# Altium PCB STM32_DEVBOARD_V1.1.PcbDoc (part 2 of 2)
Units mm, origin at the board's own origin, x right, y up, seen from the top; angles counter-clockwise.
Board outline 38.6 x 103 mm, 4 copper layers (Top Layer, Mid-Layer 1, Mid-Layer 2, Bottom Layer); 59 components, 115 nets, 379 pads, 250 vias.
Unrouted connection lines stored in the file: 6.
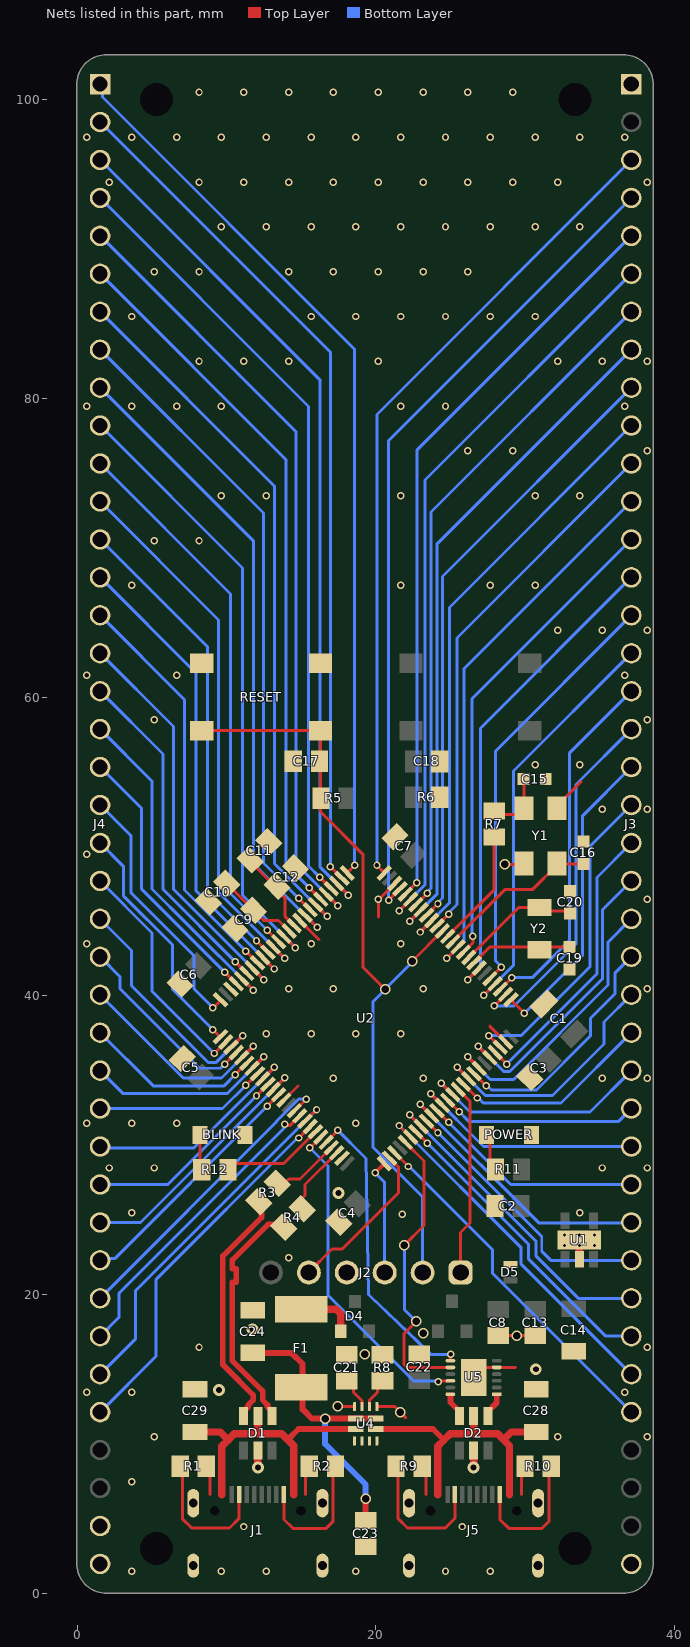
[diagram p4: the nets of this part, all layers, seen from the top]

## Via types
v1: diameter 0.5, hole 0.3, Top Layer to Bottom Layer, tented both sides, 219 vias
v2: diameter 0.7, hole 0.5, Top Layer to Bottom Layer, tented both sides, 24 vias
v3: diameter 0.8, hole 0.4, Top Layer to Bottom Layer, tented both sides, 6 vias
v4: diameter 1.27, hole 0.711, Top Layer to Bottom Layer, tented both sides, 1 vias

## Nets (pads, with @x,y where several pads share a name; then routed paths per layer and width w, separated by ;. In a path a pad name is that pad's centre, name@x,y a point inside that pad or via, vN(x,y) a via of type N, cw(c..) or ccw(c..) an arc to the next point about the centre after c; other vN are vias at no path point) (continued)
GND: BLINK.1 C1.1 C2.1 C3.1 C4.1 C5.1 C6.1 C7.1 C8.1 C9.1 C10.1 C11.1 C12.1 C13.1 C14.1 C15.1 C16.1 C17.1 C18.1 C19.1 C20.1 C21.1 C22.2 C23.1 C24.1 C28.1 C29.1 D1.2 D2.2 D5.2 J1.A1/B12 J1.A12/B1 J2.4 J3.01 J3.40 J4.39 J4.40 J5.A1/B12 J5.A12/B1 POWER.1 R1.1 R2.1 R6.1 R8.1 R9.1 R10.1 RESET.3 RESET.4 U1.2 U1.EP U1.EP_1 U1.EP_2 U1.EP_3 U1.EP_4 U1.EP_5 U1.EP_6 U2.23 U2.35 U2.48 U2.63 U2.74 U2.99 U4.3 U4.4 U4.5 U4.6 U4.9 U4.12 U5.5 U5.13 Y1.2 Y1.4 | length 31.2
  Top Layer w0.2: R1.1@8.647,8.429 8.892,8.184 J1.A1/B12@8.892,6.605 ; U2.63@13.837,33.02 14.783,33.966 ; U2.35@14.898,45.041 16.174,43.764 ; J1.A12/B1@15.292,6.605 15.292,8.184 R2.1@15.537,8.429 ; v2(17.45,12.522) 17.461,12.511 18.567,12.511 U4.12@18.567,12.5 ; U4.9@20.067,12.5 21.257,12.5 21.996,11.76 ; 20.157,45.273 v1(20.157,46.473) ; v1@20.242,46.496 U2.23@21.262,47.516 ; R9.1@23.097,8.429 23.342,8.184 J5.A1/B12@23.342,6.605 ; U5.13@26.538,14.45 27.213,15.125 U5.5@28.088,15.125 29.349,15.125 ; 27.626,37.97 U2.99@28.686,36.909 ; C8.1@28.192,17.25 C13.1@30.667,17.25 ; v2(28.617,48.8) 29.865,48.8 Y1.2@29.917,48.852 ; J5.A12/B1@29.742,6.605 R10.1@29.742,8.184 ; R10.1@29.987,8.184 R10.1@30.232,8.429 ; Y1.4@32.117,52.552 32.117,52.727 33.74,54.35
  Top Layer w0.5: D1.2@12.088,9.499 12.096,9.491 v3(12.096,8.429) ; D2.2@26.538,9.499 26.546,9.491 v3(26.546,8.429) ; U1.2@33.617,22.35 U1.EP_3@33.617,23.3 U1.EP@33.617,23.65
  other v1: 3.657,1.473 9.657,1.473 12.657,1.473 18.657,1.473 24.657,1.473 27.657,1.473 11.157,4.473 25.792,4.473 3.657,7.473 5.157,10.473 32.157,10.473 38.157,10.473 0.657,13.473 3.657,13.473 36.657,13.473 8.157,16.473 38.157,16.473 14.157,22.473 21.769,25.361 3.657,25.473 33.657,25.473 2.157,28.473 5.157,28.473 35.157,28.473 38.157,28.473 0.657,31.473 3.657,31.473 6.657,31.473 18.657,31.473 17.157,34.473 23.157,34.473 35.157,34.473 38.157,34.473 12.657,37.473 15.657,37.473 18.657,37.473 21.657,37.473 14.157,40.473 17.157,40.473 23.157,40.473 38.157,40.473 0.657,43.473 15.657,43.473 21.657,43.473 38.157,46.473 0.657,49.473 35.157,52.473 38.157,52.473 30.657,55.473 33.657,55.473 5.157,58.473 38.157,58.473 0.657,61.473 6.657,61.473 36.657,61.473 32.157,64.473 35.157,64.473 38.157,64.473 3.657,67.473 21.657,67.473 27.657,67.473 30.657,67.473 5.157,70.473 8.157,70.473 9.657,73.473 12.657,73.473 21.657,73.473 30.657,73.473 33.657,73.473 26.157,76.473 29.157,76.473 38.157,76.473 0.657,79.473 3.657,79.473 6.657,79.473 9.657,79.473 21.657,79.473 24.657,79.473 36.657,79.473 8.157,82.473 11.157,82.473 14.157,82.473 20.157,82.473 32.157,82.473 35.157,82.473 38.157,82.473 3.657,85.473 15.657,85.473 18.657,85.473 21.657,85.473 24.657,85.473 27.657,85.473 30.657,85.473 5.157,88.473 8.157,88.473 14.157,88.473 17.157,88.473 20.157,88.473 23.157,88.473 26.157,88.473 9.657,91.473 12.657,91.473 15.657,91.473 18.657,91.473 21.657,91.473 24.657,91.473 27.657,91.473 30.657,91.473 33.657,91.473 2.157,94.473 8.157,94.473 11.157,94.473 14.157,94.473 17.157,94.473 20.157,94.473 23.157,94.473 26.157,94.473 29.157,94.473 32.157,94.473 38.157,94.473 0.657,97.473 3.657,97.473 6.657,97.473 9.657,97.473 12.657,97.473 15.657,97.473 18.657,97.473 21.657,97.473 24.657,97.473 27.657,97.473 30.657,97.473 33.657,97.473 36.657,97.473 8.157,100.473 11.157,100.473 14.157,100.473 17.157,100.473 20.157,100.473 23.157,100.473 26.157,100.473 29.157,100.473
  other v2: 21.627,12.13 19.253,16.002 29.43,17.25 23.165,17.424
  other v3: 9.5,13.6 30.7,15 11.735,17.678 17.5,26.8
LED_BLINK: R12.1 U2.69 | length 6.9
  Top Layer w0.2: R12.1@10.095,28.346 10.527,28.778 13.838,28.778 U2.69@15.958,30.899
NetBLINK_2: BLINK.2 R12.2 | length 2.4
  Top Layer w0.2: BLINK.2@8.229,30.683 8.229,28.463 R12.2@8.345,28.346
NetC9_2: C9.2 C10.2 U2.37 | length 5.5
  Top Layer w0.2: C10.2@10.013,47.537 10.013,47.514 12.487,45.041 13.483,45.041 U2.37@14.19,44.334
NetC11_2: C11.2 C12.2 U2.36 | length 5.6
  Top Layer w0.2: C11.2@11.581,49.085 11.581,48.986 13.307,47.26 13.307,47.165 13.901,46.571 13.901,45.33 U2.36@14.544,44.687
NetC15_2: C15.2 R7.2 Y1.1 | length 4.1
  Top Layer w0.2: R7.2@27.917,52.15 Y1.1@29.515,52.15 ; Y1.1@29.917,52.552 C15.2@29.917,54.452
  Top Layer w0.254: Y1.1@29.515,52.15 Y1.1@29.917,52.552 ; C15.2@29.867,54.502 C15.2@29.917,54.452
NetC21_2: C21.2 U4.11 | length 2.1
  Top Layer w0.2: C21.2@18.167,14.2 18.5,13.867 18.5,13.467 19.067,12.9 U4.11@19.067,12.5
NetD4_1: D4.1 F1.1 | length 4
  Top Layer w0.5: F1.1@14.992,19.015 17.357,19.015 17.65,18.722 D4.1@17.65,17.5
NetJ1_A5: J1.A5 R1.2 | length 9.5
  Top Layer w0.2: R1.2@7.042,8.615 7.042,5 7.667,4.375 10.192,4.375 10.842,5.025 J1.A5@10.842,6.555
NetJ1_B5: J1.B5 R2.2 | length 8.9
  Top Layer w0.2: J1.B5@13.842,6.375 13.842,4.95 14.442,4.35 16.667,4.35 17.142,4.825 R2.2@17.142,8.575
NetJ1_Shell: J1.1 J1.2 J1.3 J1.4 | length 0
  Bottom Layer w0.2: J1.4@16.412,1.805 J1.4@16.442,1.775
NetJ5_A5: J5.A5 R9.2 | length 9.5
  Top Layer w0.2: R9.2@21.492,8.615 21.492,5 22.117,4.375 24.642,4.375 25.292,5.025 J5.A5@25.292,6.555
NetJ5_B5: J5.B5 R10.2 | length 8.9
  Top Layer w0.2: J5.B5@28.292,6.375 28.292,4.95 28.892,4.35 31.117,4.35 31.592,4.825 R10.2@31.592,8.575
NetJ5_Shell: J5.1 J5.2 J5.3 J5.4
NetPOWER_2: POWER.2 R11.2 | length 2.6
  Top Layer w0.2: POWER.2@27.405,30.683 27.635,30.453 27.635,28.88 27.993,28.522 R11.2@27.993,28.372
NetR3_2: R3.2 U2.72 | length 4.8
  Top Layer w0.2: R3.2@13.258,27.537 13.362,27.433 13.867,27.433 14.165,27.731 14.912,27.731 U2.72@17.019,29.838
NetR4_2: R4.2 U2.73 | length 4.7
  Top Layer w0.2: R4.2@15.061,25.746 15.051,25.756 15.051,26.428 15.251,26.628 15.251,27.363 U2.73@17.372,29.484
NetR8_2: R8.2 U4.10 | length 2.1
  Top Layer w0.2: U4.10@19.567,12.5 19.567,12.925 20.109,13.467 20.109,13.767 R8.2@20.567,14.225
NRST: C17.2 J2.2 R5.1 RESET.1 RESET.2 U2.14 | length 53.3
  Top Layer w0.2: RESET.2@8.342,57.75 RESET.1@16.292,57.75 16.292,55.7 16.292,53.35 16.217,53.275 16.284,53.208 16.284,52.317 19.119,49.482 19.119,41.923 v2(20.617,40.425) ; v2(22.442,42.325) 22.442,42.329 24.444,44.33 U2.14@24.444,44.334
  Bottom Layer w0.2: v2(22.442,42.325) 22.442,42.287 20.617,40.462 v2(20.617,40.425) 19.812,39.62 19.812,29.845 23.127,26.53 J2.2@23.127,21.475
OSC32_IN: C19.2 U2.8 Y2.1 | length 6.8
  Top Layer w0.2: U2.8@26.565,42.212 27.607,43.254 30.944,43.254 C19.2@32.942,43.254
OSC32_OUT: C20.2 U2.9 Y2.2 | length 8.2
  Top Layer w0.2: U2.9@26.211,42.566 29.559,45.914 Y2.2@30.944,45.914 31.183,45.675 C20.2@32.899,45.675
OSC_IN: C16.2 U2.12 Y1.3 | length 10.9
  Top Layer w0.2: U2.12@25.151,43.627 28.624,47.1 30.465,47.1 Y1.3@32.117,48.752 ; Y1.3@32.142,48.827 C16.2@33.891,48.827
  Top Layer w0.254: Y1.3@32.117,48.852 Y1.3@32.142,48.827
OSC_OUT: R7.1 U2.13 | length 8
  Top Layer w0.2: U2.13@24.797,43.98 27.917,47.1 R7.1@27.917,50.65
PA0: J3.06 U2.20 | length 50.2
  Top Layer w0.2: v1(21.551,45.684) U2.20@22.322,46.455
  Bottom Layer w0.2: v1(21.551,45.684) 23.292,47.425 23.292,74.525 J3.06@37.097,88.33
PA1: J3.05 U2.21 | length 50.3
  Top Layer w0.2: U2.21@21.969,46.809 v1(22.74,47.58)
  Bottom Layer w0.2: v1(22.74,47.58) 22.74,76.513 J3.05@37.097,90.87
PA2: J3.04 U2.22 | length 54.8
  Top Layer w0.2: v1(20.844,46.391) U2.22@21.615,47.162
  Bottom Layer w0.2: v1(20.844,46.391) 20.844,77.157 J3.04@37.097,93.41
PA3: J3.03 U2.25 | length 55
  Top Layer w0.2: v1(20.071,48.725) 20.554,48.241 U2.25@20.554,48.223
  Bottom Layer w0.2: v1(20.071,48.725) 20.067,48.729 20.067,78.92 J3.03@37.097,95.95
PA4: J4.01 U2.26 | length 60
  Top Layer w0.2: U2.26@18.08,48.238 v1(18.567,48.725)
  Bottom Layer w0.2: J4.01@1.537,101.03 1.692,100.875 1.692,100.162 18.567,83.287 v1(18.567,48.725)
PA5: J4.02 U2.27 | length 57.3
  Top Layer w0.2: v1(16.955,48.641) U2.27@17.726,47.869
  Bottom Layer w0.2: J4.02@1.545,98.497 16.955,83.087 v1(16.955,48.641)
PA6: J4.03 U2.28 | length 57.2
  Top Layer w0.2: U2.28@17.372,47.516 v1(18.144,46.744)
  Bottom Layer w0.2: J4.03@1.537,95.95 16.248,81.239 16.248,48.641 v1(18.144,46.744)
PA7: J4.04 U2.29 | length 53.2
  Top Layer w0.2: v1(16.248,47.933) U2.29@17.019,47.162
  Bottom Layer w0.2: J4.04@1.138,93.809 15.492,79.455 15.492,48.689 v1(16.248,47.933)
PA15: J3.36 U2.78 | length 24
  Top Layer w0.2: U2.78@21.262,29.484 v1(22.173,28.573)
  Bottom Layer w0.2: v1(22.173,28.573) 22.227,28.573 27.8,23 27.8,21.427 J3.36@37.117,12.11
PB0: J4.07 U2.32 | length 47.8
  Top Layer w0.2: U2.32@15.958,46.101 v1(16.73,45.33)
  Bottom Layer w0.2: J4.07@1.537,85.79 13.217,74.11 13.217,48.843 v1(16.73,45.33)
PB1: J4.08 U2.33 | length 43.3
  Top Layer w0.2: v1(14.833,46.519) U2.33@15.605,45.748
  Bottom Layer w0.2: J4.08@1.537,83.25 12.467,72.32 12.467,48.886 v1(14.833,46.519)
PB2: J4.09 U2.34 | length 43.3
  Top Layer w0.2: U2.34@15.251,45.394 v1(16.068,44.577)
  Bottom Layer w0.2: J4.09@1.537,80.71 11.817,70.43 11.817,48.828 v1(16.068,44.577)
PB4: J3.26 U2.91 | length 13.7
  Top Layer w0.2: U2.91@25.858,34.081 v1(26.781,33.158)
  Bottom Layer w0.2: v1(26.781,33.158) 26.862,33.158 27.192,32.827 32.394,32.827 J3.26@37.097,37.53
PB5: J3.25 U2.92 | length 17.2
  Top Layer w0.2: v1(25.44,35.205) U2.92@26.211,34.434
  Bottom Layer w0.2: v1(25.44,35.205) 27.32,33.325 31.817,33.325 35.267,36.775 35.267,38.24 J3.25@37.097,40.07
PB6: J3.24 U2.93 | length 16.2
  Top Layer w0.2: U2.93@26.565,34.788 v1(27.385,33.968)
  Bottom Layer w0.2: v1(27.385,33.968) 27.466,33.968 27.734,33.7 30.742,33.7 34.367,37.325 34.367,38.495 35.992,40.12 35.992,41.505 J3.24@37.097,42.61
PB7: J3.23 U2.94 | length 18.8
  Top Layer w0.2: v1(26.147,35.913) U2.94@26.918,35.141
  Bottom Layer w0.2: v1(26.147,35.913) 27.66,34.4 29.218,34.4 35.535,40.716 35.535,43.588 J3.23@37.097,45.15
PB9: J3.22 U2.96 | length 20
  Top Layer w0.2: v1(26.847,36.626) U2.96@27.626,35.848
  Bottom Layer w0.2: v1(26.847,36.626) 28.549,34.925 28.954,34.925 35.154,41.125 35.154,45.747 J3.22@37.097,47.69
PB10: J4.19 U2.47 | length 18.3
  Top Layer w0.2: v1(9.884,41.569) U2.47@10.655,40.798
  Bottom Layer w0.2: J4.19@1.537,55.31 4.317,52.53 4.317,47.136 v1(9.884,41.569)
PB11: J4.20 U2.50 | length 17.4
  Top Layer w0.2: v1(9.092,39.2) 9.126,39.2 U2.50@9.622,39.695
  Bottom Layer w0.2: J4.20@1.537,52.77 3.617,50.69 3.617,46.88 7.817,42.68 7.817,40.475 v1(9.092,39.2)
PB12: J4.21 U2.51 | length 16.3
  Top Layer w0.2: v1(9.092,37.725) 9.554,37.263 U2.51@9.594,37.263
  Bottom Layer w0.2: J4.21@1.537,50.23 3.092,48.675 3.092,46.7 6.392,43.4 6.392,40.425 v1(9.092,37.725)
PB13: J4.22 U2.52 | length 15.8
  Top Layer w0.2: v1(9.176,36.138) U2.52@9.948,36.909
  Bottom Layer w0.2: J4.22@1.537,47.69 5.017,44.21 5.017,40.297 v1(9.176,36.138)
PB14: J4.23 U2.53 | length 16.8
  Top Layer w0.2: U2.53@10.301,36.555 v1(11.073,37.327)
  Bottom Layer w0.2: J4.23@1.467,45.2 3.642,43.025 3.642,40.675 8.792,35.525 9.271,35.525 v1(11.073,37.327)
PB15: J4.24 U2.54 | length 13.1
  Top Layer w0.2: v1(9.884,35.431) U2.54@10.655,36.202
  Bottom Layer w0.2: J4.24@1.537,42.61 2.867,41.28 2.867,40.475 8.192,35.15 9.603,35.15 v1(9.884,35.431)
PC0: J3.11 U2.15 | length 36.3
  Top Layer w0.2: U2.15@24.09,44.687 v1(24.861,45.459)
  Bottom Layer w0.2: v1(24.861,45.459) 24.861,45.54 25.425,46.104 25.425,63.958 J3.11@37.097,75.63
PC1: J3.10 U2.16 | length 40.8
  Top Layer w0.2: v1(22.965,44.269) U2.16@23.736,45.041
  Bottom Layer w0.2: v1(22.965,44.269) 24.917,46.222 24.917,65.99 J3.10@37.097,78.17
PC2: J3.09 U2.17 | length 41
  Top Layer w0.2: U2.17@23.383,45.394 v1(24.154,46.166)
  Bottom Layer w0.2: v1(24.154,46.166) 24.154,46.247 24.46,46.553 24.46,68.073 J3.09@37.097,80.71
PC3: J3.08 U2.18 | length 45.5
  Top Layer w0.2: v1(22.258,44.976) U2.18@23.029,45.748
  Bottom Layer w0.2: v1(22.258,44.976) 24.079,46.798 24.079,70.232 J3.08@37.097,83.25
PC4: J4.05 U2.30 | length 52.5
  Top Layer w0.2: U2.30@16.665,46.809 v1(17.437,46.037)
  Bottom Layer w0.2: J4.05@1.537,90.87 14.642,77.765 14.642,48.832 v1(17.437,46.037)
PC5: J4.06 U2.31 | length 48
  Top Layer w0.2: v1(15.54,47.226) U2.31@16.312,46.455
  Bottom Layer w0.2: J4.06@1.537,88.33 13.97,75.897 13.97,48.797 v1(15.54,47.226)
PC6: J4.33 U2.65 | length 20.5
  Top Layer w0.2: U2.65@14.544,32.313 14.563,32.313 15.315,33.065 v1(15.334,33.065)
  Bottom Layer w0.2: J4.33@1.537,19.75 13.332,31.545 13.332,31.583 14.833,33.084 15.315,33.084 v1(15.334,33.065)
PC7: J4.34 U2.66 | length 20.6
  Top Layer w0.2: v1(13.904,31.41) 13.985,31.41 14.069,31.327 14.265,31.327 U2.66@14.898,31.959
  Bottom Layer w0.2: J4.34@1.537,17.21 2.792,18.465 2.792,20.075 13.847,31.13 13.847,31.353 v1(13.904,31.41)
PC8: J4.35 U2.67 | length 24.8
  Top Layer w0.2: U2.67@15.251,31.606 v1(16.022,32.377)
  Bottom Layer w0.2: J4.35@1.537,14.67 3.917,17.05 3.917,20.272 v1(16.022,32.377)
PC9: J4.36 U2.68 | length 25
  Top Layer w0.2: v1(14.833,30.481) U2.68@15.605,31.252
  Bottom Layer w0.2: J4.36@1.537,12.13 5.292,15.885 5.292,21.021 14.752,30.481 v1(14.833,30.481)
PC12: J3.35 U2.81 | length 24.2
  Top Layer w0.2: v1(21.551,31.316) U2.81@22.322,30.545
  Bottom Layer w0.2: v1(21.551,31.316) 29.7,23.167 29.7,22.067 J3.35@37.097,14.67
PC13: J3.14 U2.7 | length 32.5
  Top Layer w0.2: v1(26.147,41.087) U2.7@26.918,41.859
  Bottom Layer w0.2: v1(26.147,41.087) 26.992,41.932 26.992,57.905 J3.14@37.097,68.01
PD0: J3.34 U2.82 | length 20.7
  Top Layer w0.2: U2.82@22.676,30.899 v1(23.447,30.127)
  Bottom Layer w0.2: v1(23.447,30.127) 30.197,23.377 30.197,22.403 35.39,17.21 J3.34@37.097,17.21
PD1: J3.33 U2.83 | length 21.6
  Top Layer w0.2: v1(22.258,32.024) U2.83@23.029,31.252
  Bottom Layer w0.2: v1(22.258,32.024) 30.7,23.581 30.7,22.6 33.55,19.75 J3.33@37.097,19.75
PD2: J3.32 U2.84 | length 18.2
  Top Layer w0.2: U2.84@23.383,31.606 v1(24.154,30.834)
  Bottom Layer w0.2: v1(24.154,30.834) 31.1,23.889 31.1,22.9 31.71,22.29 J3.32@37.097,22.29
PD3: J3.31 U2.85 | length 18.5
  Top Layer w0.2: v1(22.965,32.731) U2.85@23.736,31.959
  Bottom Layer w0.2: v1(22.965,32.731) 30.896,24.8 J3.31@37.067,24.8
PD4: J3.30 U2.86 | length 15.1
  Top Layer w0.2: U2.86@24.09,32.313 v1(24.861,31.541)
  Bottom Layer w0.2: v1(24.861,31.541) 29.033,27.37 J3.30@37.097,27.37
PD5: J3.29 U2.87 | length 16
  Top Layer w0.2: v1(23.672,33.438) U2.87@24.444,32.666
  Bottom Layer w0.2: v1(23.672,33.438) 27.2,29.91 J3.29@37.097,29.91
PD6: J3.28 U2.88 | length 13.2
  Top Layer w0.2: U2.88@24.797,33.02 v1(25.568,32.249)
  Bottom Layer w0.2: v1(25.568,32.249) 26.217,31.6 36.247,31.6 J3.28@37.097,32.45
PD7: J3.27 U2.89 | length 15.7
  Top Layer w0.2: v1(24.379,34.145) U2.89@25.151,33.373
  Bottom Layer w0.2: v1(24.379,34.145) 26.296,32.228 34.335,32.228 J3.27@37.097,34.99
PD8: J4.25 U2.55 | length 14.6
  Top Layer w0.2: U2.55@11.008,35.848 v1(11.78,36.62)
  Bottom Layer w0.2: J4.25@1.537,40.07 1.501,40.106 7.109,34.498 9.659,34.498 v1(11.78,36.62)
PD9: J4.26 U2.56 | length 12
  Top Layer w0.2: v1(10.591,34.723) U2.56@11.362,35.495
  Bottom Layer w0.2: J4.26@1.501,37.566 5.092,33.975 9.842,33.975 v1(10.591,34.723)
PD10: J4.27 U2.57 | length 13.7
  Top Layer w0.2: U2.57@11.716,35.141 v1(12.487,35.913)
  Bottom Layer w0.2: J4.27@1.537,34.99 3.077,33.45 10.024,33.45 v1(12.487,35.913)
PD11: J4.28 U2.58 | length 11.5
  Top Layer w0.2: v1(11.298,34.016) U2.58@12.069,34.788
  Bottom Layer w0.2: J4.28@1.537,32.45 9.731,32.45 v1(11.298,34.016)
PD12: J4.29 U2.59 | length 15
  Top Layer w0.2: U2.59@12.423,34.434 v1(13.194,35.205)
  Bottom Layer w0.2: J4.29@1.537,29.8 7.789,29.8 v1(13.194,35.205)
PD13: J4.30 U2.60 | length 14
  Top Layer w0.2: v1(12.005,33.309) U2.60@12.776,34.081
  Bottom Layer w0.2: J4.30@1.537,27.37 6.066,27.37 v1(12.005,33.309)
PD14: J4.31 U2.61 | length 17.5
  Top Layer w0.2: U2.61@13.13,33.727 v1(13.901,34.498)
  Bottom Layer w0.2: J4.31@1.537,24.83 4.233,24.83 v1(13.901,34.498)
PD15: J4.32 U2.62 | length 16.5
  Top Layer w0.2: v1(12.712,32.602) U2.62@13.483,33.373
  Bottom Layer w0.2: J4.32@1.537,22.4 2.51,22.4 v1(12.712,32.602)
PE0: J3.21 U2.97 | length 19.3
  Top Layer w0.2: U2.97@27.979,36.202 v1(28.75,35.431)
  Bottom Layer w0.2: v1(28.75,35.431) 34.792,41.472 34.792,47.925 J3.21@37.097,50.23
PE1: J3.20 U2.98 | length 21.7
  Top Layer w0.2: v1(27.561,37.327) U2.98@28.333,36.555
  Bottom Layer w0.2: v1(27.561,37.327) 29.719,37.327 34.317,41.925 34.317,49.99 J3.20@37.097,52.77
PE2: J3.19 U2.1 | length 20.7
  Top Layer w0.2: U2.1@29.04,39.737 29.04,39.727 v1(29.942,38.825)
  Bottom Layer w0.2: v1(29.942,38.825) 33.842,42.725 33.842,52.055 J3.19@37.097,55.31
PE3: J3.18 U2.2 | length 24.2
  Top Layer w0.2: v1(27.915,39.32) U2.2@28.686,40.091
  Bottom Layer w0.2: v1(27.915,39.32) 29.248,39.32 33.392,43.463 33.392,54.145 J3.18@37.097,57.85
PE4: J3.17 U2.3 | length 24.4
  Top Layer w0.2: U2.3@28.333,40.445 v1(29.104,41.216)
  Bottom Layer w0.2: v1(29.104,41.216) 30.458,41.216 32.942,43.7 32.942,56.235 J3.17@37.097,60.39
PE5: J3.16 U2.4 | length 28.1
  Top Layer w0.2: v1(27.208,40.027) U2.4@27.979,40.798
  Bottom Layer w0.2: v1(27.208,40.027) 29.217,42.036 29.217,55.05 J3.16@37.097,62.93
PE6: J3.15 U2.5 | length 28.6
  Top Layer w0.2: U2.5@27.626,41.152 27.626,41.154 28.392,41.921 v1(28.392,41.923)
  Bottom Layer w0.2: v1(28.392,41.923) 28.392,41.951 28.017,42.326 28.017,56.39 J3.15@37.097,65.47
PE7: J4.10 U2.38 | length 41.5
  Top Layer w0.2: U2.38@13.837,43.98 v1(14.608,43.209)
  Bottom Layer w0.2: J4.10@1.537,78.17 11.067,68.64 11.067,46.75 v1(14.608,43.209)
PE8: J4.11 U2.39 | length 37
  Top Layer w0.2: v1(12.712,44.398) U2.39@13.483,43.627
  Bottom Layer w0.2: J4.11@1.537,75.63 10.267,66.9 10.267,46.843 v1(12.712,44.398)
PE9: J4.12 U2.40 | length 36.8
  Top Layer w0.2: U2.40@13.13,43.273 v1(13.901,42.502)
  Bottom Layer w0.2: J4.12@1.537,73.09 9.467,65.16 9.467,46.936 v1(13.901,42.502)
PE10: J4.13 U2.41 | length 32.3
  Top Layer w0.2: v1(12.005,43.691) U2.41@12.776,42.919
  Bottom Layer w0.2: J4.13@1.537,70.55 8.717,63.37 8.717,46.979 v1(12.005,43.691)
PE11: J4.14 U2.42 | length 32.1
  Top Layer w0.2: U2.42@12.423,42.566 v1(13.194,41.795)
  Bottom Layer w0.2: J4.14@1.537,68.01 7.942,61.605 7.942,47.047 8.764,46.225 v1(13.194,41.795)
PE12: J4.15 U2.43 | length 27.6
  Top Layer w0.2: v1(11.298,42.984) U2.43@12.069,42.212
  Bottom Layer w0.2: J4.15@1.537,65.47 7.192,59.815 7.192,47.089 8.406,45.875 v1(11.298,42.984)
PE13: J4.16 U2.44 | length 27.5
  Top Layer w0.2: U2.44@11.716,41.859 v1(12.487,41.087)
  Bottom Layer w0.2: J4.16@1.537,62.93 6.442,58.025 6.442,47.132 v1(12.487,41.087)
PE14: J4.17 U2.45 | length 23
  Top Layer w0.2: v1(10.591,42.277) U2.45@11.362,41.505
  Bottom Layer w0.2: J4.17@1.537,60.39 5.742,56.185 5.742,47.125 v1(10.591,42.277)
PE15: J4.18 U2.46 | length 22.8
  Top Layer w0.2: U2.46@11.008,41.152 v1(11.78,40.38)
  Bottom Layer w0.2: J4.18@1.537,57.85 5.017,54.37 5.017,47.143 7.335,44.825 v1(11.78,40.38)
PF2: J3.07 U2.19 | length 45.7
  Top Layer w0.2: U2.19@22.676,46.101 v1(23.447,46.873)
  Bottom Layer w0.2: v1(23.447,46.873) 23.447,46.954 23.692,47.199 23.692,72.385 J3.07@37.097,85.79
PF9: J3.13 U2.10 | length 32.3
  Top Layer w0.2: U2.10@25.858,42.919 26.492,43.554 v1(26.492,43.975)
  Bottom Layer w0.2: v1(26.492,43.975) 26.435,44.032 26.435,44.232 26.424,44.242 26.424,59.877 J3.13@37.097,70.55
PF10: J3.12 U2.11 | length 36.8
  Top Layer w0.2: v1(24.733,42.502) U2.11@25.504,43.273
  Bottom Layer w0.2: v1(24.733,42.502) 25.883,43.651 25.883,61.876 J3.12@37.097,73.09
RTS: U2.80 U5.8 | length 19.8
  Top Layer w0.2: v2(21.9,23.3) 23.216,24.616 23.216,28.945 U2.80@21.969,30.191 ; v2(22.7,18.2) 21.895,17.395 21.895,15.31 22.08,15.125 U5.8@24.988,15.125
  Bottom Layer w0.2: v2(21.9,23.3) 21.9,19 v2(22.7,18.2)
RX_STM32: U2.71 U5.7 | length 20.4
  Top Layer w0.2: U2.71@16.665,30.191 16.665,30.207 17.442,30.984 v1(17.442,31) ; U5.7@24.988,15.575 24.994,15.581 24.994,15.994 v1(25,16)
  Bottom Layer w0.2: v1(17.442,31) 19.271,29.171 19.33,29.112 19.517,20.071 19.519,19.991 19.576,19.934 ccw(c19.717,20.075) 19.577,19.932 23.468,16.2 23.668,16 v1(25,16)
SWCLK: J2.5 U2.77 | length 10.8
  Top Layer w0.2: J2.5@15.507,21.5 17.052,23.045 17.737,23.045 21.495,26.803 21.495,28.544 U2.77@20.908,29.131
SWDIO: J2.3 U2.76 | length 7.8
  Top Layer w0.254: v1(19.942,28.15) U2.76@20.534,28.742
  Bottom Layer w0.2: v1(19.942,28.15) 20.587,27.505 J2.3@20.587,21.5
SWO: J2.1 U2.90 | length 13
  Top Layer w0.2: U2.90@25.367,33.875 26.299,32.943 26.299,24.782 25.667,24.15 J2.1@25.667,21.5
TX_STM32: U2.70 U5.10 | length 22
  Top Layer w0.2: v1(15.579,29.813) U2.70@16.312,30.545 ; v1(24.167,14.175) 24.207,14.215 24.978,14.215 U5.10@24.988,14.225
  Bottom Layer w0.2: v1(15.579,29.813) 16.792,28.6 16.792,19.95 22.517,14.225 24.117,14.225 v1(24.167,14.175)
USB_2_DIFF_N: D2.4 U5.1 | length 1.6
  Top Layer w0.381: D2.4@27.496,11.875 27.496,12.175 28.083,12.762 U5.1@28.083,13.24
USB_2_DIFF_P: D2.6 U5.12 | length 1.6
  Top Layer w0.381: U5.12@24.988,13.24 24.988,12.783 25.596,12.175 D2.6@25.596,11.875
USB_DIFF_N: D1.6 R3.1 | length 16.6
  Top Layer w0.381: D1.6@11.146,11.875 11.146,12.175 11.455,12.485 11.455,12.616 11.778,12.939 11.778,13.277 9.942,15.113 9.756,15.299 9.756,22.581 12.335,25.16 12.335,25.476 12.148,25.663 R3.1@12.148,26.206
USB_DIFF_P: D1.4 R4.1 | length 16.6
  Top Layer w0.381: D1.4@13.046,11.875 13.046,12.175 12.736,12.485 12.736,12.616 12.413,12.939 12.413,13.54 10.391,15.562 10.391,19.755 10.391,20.834 10.654,20.834 10.654,21.723 10.391,21.723 10.391,22.114 10.391,22.318 12.773,24.7 13.088,24.7 13.28,24.509 R4.1@13.823,24.509
VIN: C23.2 C24.2 F1.2 U4.1 U4.8 | length 19.5
  Top Layer w0.4: C24.2@11.892,16.1 14.342,16.1 15.092,15.35 F1.2@15.092,13.985 ; F1.2@15.092,13.81 15.092,12.32 15.712,11.7 v2(16.6,11.7) U4.1@18.642,11.7 U4.8@19.992,11.7 ; C23.2@19.317,4.875 v2(19.317,6.325)
  Bottom Layer w0.4: v2(16.6,11.7) 16.6,10 19.317,7.283 v2(19.317,6.325)
VIN_USB_1: C29.2 D1.5 J1.A4/B9 J1.A9/B4 U4.2 | length 20.5
  Top Layer w0.4: 14.092,10.275 14.817,11 U4.2@18.642,11
  Top Layer w0.5: C29.2@7.892,10.8 9.567,10.8 10.104,10.263 ; J1.A4/B9@9.692,6.605 9.692,9.85 10.104,10.263 ; 12.096,10.73 D1.5@12.096,11.875 ; D1.5@12.096,12.113 D1.5@12.139,12.07 ; J1.A9/B4@14.492,6.605 14.492,9.875 14.092,10.275 13.692,10.675 10.517,10.675 10.104,10.263
VIN_USB_2: C28.2 D2.5 J5.A4/B9 J5.A9/B4 U4.7 | length 20.5
  Top Layer w0.4: U4.7@19.992,11 23.817,11 24.555,10.263
  Top Layer w0.5: J5.A4/B9@24.142,6.605 24.142,9.85 24.555,10.263 24.967,10.675 26.603,10.675 ; D2.5@26.546,11.875 26.546,10.732 26.603,10.675 ; J5.A9/B4@28.942,6.605 28.942,9.875 28.542,10.275 ; C28.2@30.742,10.8 29.067,10.8 28.542,10.275 ; 26.603,10.675 28.142,10.675 28.542,10.275
pads on no net: D3.2 D4.2 J1.A8 J1.B8 J1.MH1 J1.MH2 J5.A8 J5.B8 J5.MH1 J5.MH2 U1.4 U5.3 U5.6

## Polygon pours and split planes (outlines as drawn)
+5 on Top Layer "NONET_L-01_P-001" (solid, shelved, pour order 1): 26.867,18.152 34.739,18.152 35.067,18.41 35.067,23 32.167,23 30.698,21.6 26.867,21.6
GND on Top Layer "NONET_L-01_P-001" (solid, remove dead copper, shelved, pour order 4): -0.033,103 38.567,103 38.567,0 -0.033,0
+3.3 on Mid-Layer 2 "NONET_L-01_P-001" (solid, shelved, pour order 6): 0,0 38.608,0 38.608,102.997 0,102.997
GND on Mid-Layer 1 "NONET_L-01_P-001" (solid, shelved, pour order 5): 0,0 38.608,0 38.608,102.997 0,102.997
GND on Bottom Layer "NONET_L-01_P-001" (solid, remove dead copper, shelved, pour order 2): -0.033,103 38.567,103 38.567,0 -0.033,0

## Keep-outs
Keep-Out Layer:
  region: 29.417,53.25 32.592,53.25 32.592,48.15 29.417,48.15

## Silkscreen, mask and mechanical layers (free items; w line width, h text height)
Top Overlay:
  lines w0.1: 2.417,1.96 2.617,1.96 ; 2.417,4.51 2.617,4.51 ; 2.417,7.04 2.617,7.04 ; 2.417,9.59 2.617,9.59 ; 2.637,1.97 2.637,4.51 ; 2.637,7.05 2.637,9.59 ; 2.845,100.025 3.77,100.025 ; 34.692,36.075 35.917,36.075 ; 34.717,3.245 35.942,3.245 ; 34.717,13.379 35.942,13.379 ; 34.717,16.275 35.942,16.275 ; 34.717,18.625 35.942,18.625 ; 34.717,20.7 35.942,20.7 ; 34.717,38.6 35.942,38.6 ; 34.717,41.25 35.942,41.25 ; 34.742,46.275 35.967,46.275 ; 34.742,48.775 35.967,48.775 ; 34.767,43.8 35.992,43.8 ; 34.864,99.925 35.839,99.925 ; 35.997,7.05 35.997,9.59 ; 36.017,7.05 36.217,7.05 ; 36.017,9.6 36.217,9.6
  text "PA4" at 3.642,100.725 h0.7 r90
  text "GND" at 35.692,100.4 h0.7 r90
  text "3V3" at 35.667,97.475 h0.7 r90
  text "PA5" at 3.692,97.4 h0.7 r90
  text "PA6" at 2.942,95.55 h0.7
  text "PA3" at 33.767,95.5 h0.7
  text "PA7" at 2.942,93.01 h0.7
  text "PA2" at 33.792,93.025 h0.7
  text "PA1" at 34.042,90.5 h0.7
  text "PC4" at 2.942,90.47 h0.7
  text "PA0" at 33.817,87.975 h0.7
  text "PC5" at 2.942,87.93 h0.7
  text "PF2" at 33.767,85.475 h0.7
  text "PB0" at 2.942,85.39 h0.7
  text "PC3" at 33.817,82.875 h0.7
  text "PB1" at 2.942,82.85 h0.7
  text "PB2" at 2.942,80.31 h0.7
  text "PC2" at 33.817,80.3 h0.7
  text "PC1" at 34.067,77.8 h0.7
  text "PE7" at 2.942,77.77 h0.7
  text "PE8" at 2.942,75.23 h0.7
  text "PC0" at 33.817,75.225 h0.7
  text "PE9" at 2.942,72.69 h0.7
  text "PF10" at 33.242,72.7 h0.7
  text "PE10" at 2.942,70.15 h0.7
  text "PF9" at 33.842,70.15 h0.7
  text "PE11" at 2.942,67.61 h0.7
  text "PC13" at 33.242,67.625 h0.7
  text "PE6" at 33.842,65.1 h0.7
  text "PE12" at 2.942,65.07 h0.7
  text "PE5" at 33.817,62.55 h0.7
  text "PE13" at 2.942,62.53 h0.7
  text "PE14" at 2.942,59.99 h0.7
  text "PE4" at 33.842,60 h0.7
  text "PE3" at 33.792,57.475 h0.7
  text "PE15" at 2.942,57.45 h0.7
  text "PB10" at 2.942,54.91 h0.7
  text "PE2" at 33.817,54.9 h0.7
  text "PE1" at 34.067,52.4 h0.7
  text "PB11" at 2.942,52.37 h0.7
  text "PB12" at 2.942,49.83 h0.7
  text "PE0" at 35.667,49.125 h0.7 r90
  text "PB13" at 2.942,47.29 h0.7
  text "PB9" at 35.667,46.625 h0.7 r90
  text "PB14" at 2.942,44.75 h0.7
  text "PB7" at 35.692,44.1 h0.7 r90
  text "PB15" at 2.942,42.21 h0.7
  text "PB6" at 35.642,41.55 h0.7 r90
  text "PD8" at 2.942,39.67 h0.7
  text "PB5" at 35.692,39.05 h0.7 r90
  text "PD9" at 2.942,37.13 h0.7
  text "Designed by  / Felix and Felix" at 13.642,36.854 h0.7
  text "PB4" at 35.692,36.475 h0.7 r90
  text "PD10" at 2.942,34.59 h0.7
  text "PD7" at 35.667,33.9 h0.7 r90
  text "PD11" at 2.942,32.05 h0.7
  text "PD6" at 33.842,32.05 h0.7
  text "PD5" at 33.817,29.575 h0.7
  text "PD12" at 2.942,29.51 h0.7
  text "PD4" at 33.867,27.025 h0.7
  text "PD13" at 2.942,26.97 h0.7
  text "PD3" at 33.867,25.725 h0.7
  text "PD14" at 2.942,24.43 h0.7
  text "PD15" at 2.942,21.89 h0.7
  text "PD2" at 33.817,20.875 h0.7
  text "PC6" at 2.942,19.35 h0.7
  text "PD1" at 35.717,18.85 h0.7 r90
  text "PC7" at 2.942,16.81 h0.7
  text "PD0" at 35.717,16.575 h0.7 r90
  text "PC8" at 2.942,14.27 h0.7
  text "PC12" at 35.692,13.625 h0.7 r90
  text "PC9" at 2.942,11.73 h0.7
  text "PA15" at 35.689,10.641 h0.7 r90
  text "5V" at 35.765,7.745 h0.7 r90
  text "3V3" at 3.642,7.365 h0.7 r90
  text "5VIN" at 35.689,3.58 h0.7 r90
  text "GND" at 3.642,2.374 h0.7 r90
  text "GND" at 35.692,1.006 h0.7 r90
Board Shape:
  the board outline again, w0.254